# Altium PCB Load_Cell_Board.PcbDoc
Units mm, origin at the board's own origin, x right, y up, seen from the top; angles counter-clockwise.
Board outline 33.66 x 10.48 mm, 2 copper layers (Top Layer, Bottom Layer); 8 components, 8 nets, 28 pads, 0 vias.
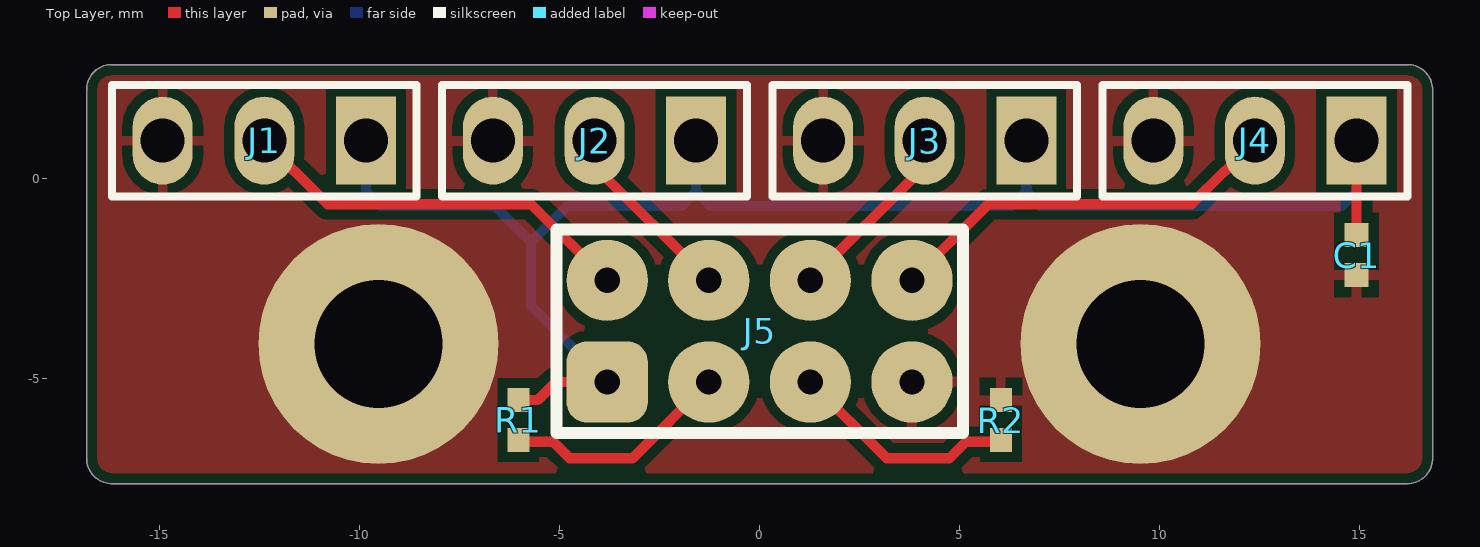
[diagram p0: Top Layer view]
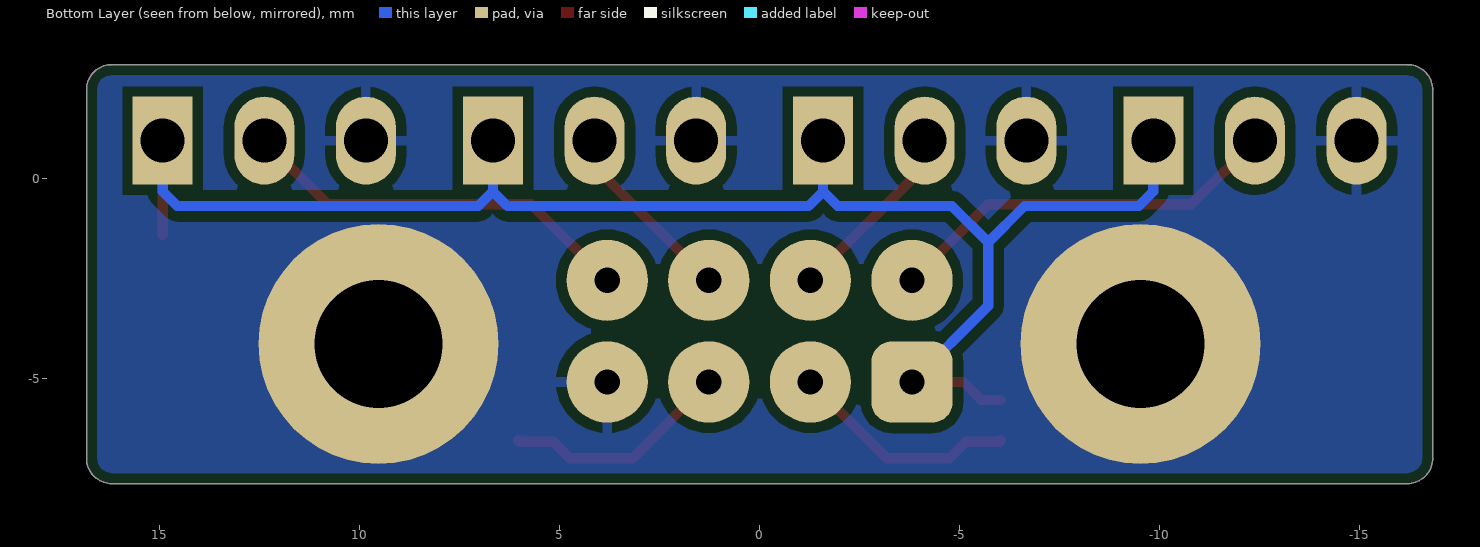
[diagram p1: Bottom Layer view, seen from below]
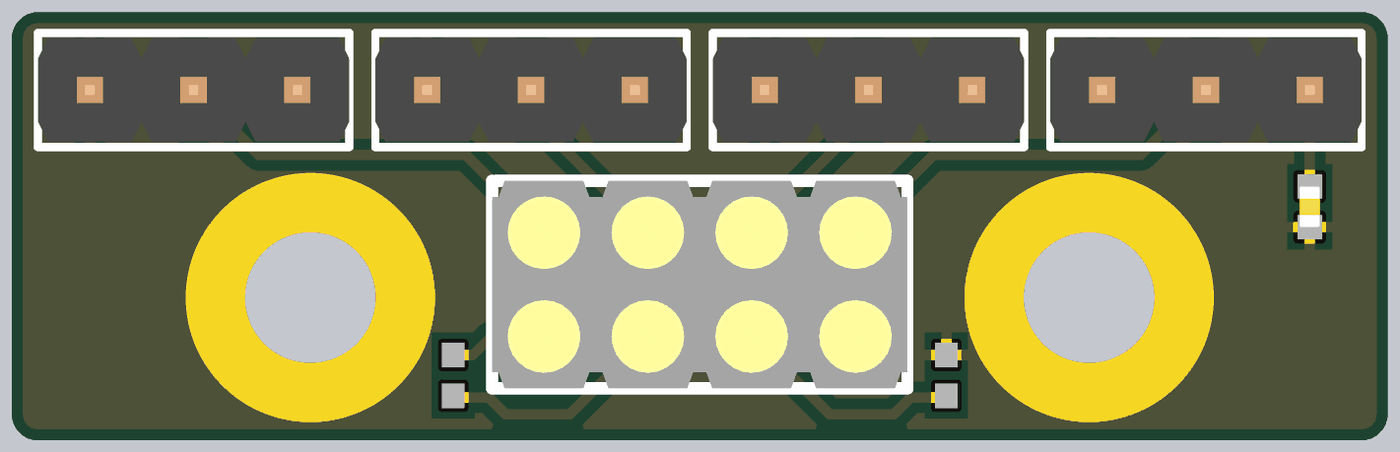
[diagram p2: 3D render of the assembled board from above, using the file's embedded part models]

## Layer stack, top to bottom
Top Solder: solder mask 0.0102, Solder Resist, Dk 3.5
Top Layer: signal copper 0.0356
Dielectric 1: dielectric 0.32, FR-4, Dk 4.8
Bottom Layer: signal copper 0.0356
Bottom Solder: solder mask 0.0102, Solder Resist, Dk 3.5

## Board outline
-16.192,-7.62 cw(c-16.192,-6.985) -16.828,-6.985 -16.828,2.222 cw(c-16.192,2.222) -16.192,2.857 16.192,2.857 cw(c16.192,2.222) 16.828,2.222 16.828,-6.985 cw(c16.192,-6.985) 16.192,-7.62

## Design rules (kind name [scope] priority, off if disabled: settings)
Clearance [All] p1: gap=0.254 ignorepadtopadclearanceinfootprint=FALSE except(0: Arc-Hole Track-Hole SMDPad-Hole THPad-Hole Via-Hole Fill-Hole Poly-Hole Region-Hole Text-Hole)
PolygonConnect [All] p1: connectstyle=Relief reliefconductorwidth=0.254 reliefentries=4 polygonreliefangle="90 Angle" airgapwidth=0.254
RoutingVias [All] p1: holewidth=0.711 width=1.27 viastyle="Through Hole" minholewidth=0.711 minwidth=1.27 maxholewidth=0.711 maxwidth=1.27
SolderMaskExpansion [All] p1: expansion=0.102 istentingtop=FALSE
Width [All] p1: maxlimit=0.254 minlimit=0.254 preferedwidth=0.254
30 further rules are at their usual default settings.

## Components (designator, comment, footprint, x,y, rotation, side; value= is the part's Value field where it differs from the comment)
C1 "10uF" Cap,SMD,0402 14.922,-1.905 r90 top
J1 "Term,Header,3 Pin,Top,2.54mm" Term,Header,3Pin,2.54mm -12.383,0.953 r180 top
J2 "Term,Header,3 Pin,Top,2.54mm" Term,Header,3Pin,2.54mm -4.127,0.953 r180 top
J3 "Term,Header,3 Pin,Top,2.54mm" Term,Header,3Pin,2.54mm 4.127,0.953 r180 top
J4 "Term,Header,3 Pin,Top,2.54mm" Term,Header,3Pin,2.54mm 12.383,0.953 r180 top
J5 "Conn,Spring,Target,8Pos,Thru" CONN,SPRING,TARGET,8POS,THRU -3.81,-5.08 r0 top
R1 "1k" RES,0402 -6.032,-6.032 r270 top
R2 "1k" RES,0402 6.032,-6.032 r270 top

## Footprints (in the part's own frame and the unit in brackets; to place one, negate y for a bottom-side part, rotate by r counter-clockwise, add the part's x,y. Pads: shape width x height; smd on the part's side, far side on the other; paste and mask are expansions set on the pad)
Cap,SMD,0402 [mm] "KEMET C0402C100K5GACTU"
  rect 0.6x0.6 smd: 1(-0.5,0) 2(0.5,0)
  body extent -0.5,-0.25 0.5,0.25, height 0.5
CONN,SPRING,TARGET,8POS,THRU [mil] "Mill Max Manufacturing Corp. 419-10-208-00-006000"
  rrect50% 80x80 hole 25 mask+1.97: 1(0,0)
  round 80 hole 25 mask+1.97: 2(100,0) 3(200,0) 4(300,0) 5(300,100) 6(200,100) 7(100,100) 8(0,100)
  silkscreen extent -50,-50 350,150, body extent -50,-50 350,150, height 166
RES,0402 [mm] "Yageo RC0402FR-0722RL"
  rect 0.6x0.55 smd: 1(-0.5,0) 2(0.5,0)
  body extent -0.5,-0.25 0.5,0.25, height 0.35
Term,Header,3Pin,2.54mm [mm] "Würth Elektronik 61300311121"
  rect 1.5x2.2 hole 1.1 mask+0.05: 1(-2.54,0)
  oval 1.5x2.2 hole 1.1 mask+0.05: 2(0,0) 3(2.54,0)
  silkscreen extent -3.81,-1.4 3.81,1.4, body extent -3.81,-1.27 3.81,1.27, height 8.57

## Part data
C1: library part CAP,Cer,10uF,10VDC,X5R,0402, "10 µF ±20% 10V Ceramic Capacitor X5R 0402 (1005 Metric)", Manufacturer="Samsung Electro-Mechanics", Manufacturer Part Number=CL05A106MP5NUNC, Vendor Part Number=1276-1450-1-ND, CreatedBy="Judd Foster", HelpURL=https://media.digikey.com/pdf/Data%20Sheets/Samsung%20PDFs/CL05A106MP5NUNC_Spec.pdf, Vendor=Digikey
J1 J2 J3 J4: "CONN HEADER VERT 3POS 2.54MM", Manufacturer="Würth Elektronik", Manufacturer Part Number=61300311121, Vendor Part Number=732-5316-ND, Created By="Judd Foster", HelpURL=https://katalog.we-online.de/em/datasheet/6130xx11121.pdf, Vendor=Digikey
J5: "8 Position Spring Mating Target Connector Through Hole", Manufacturer="Mill-Max Manufacturing Corp.", Manufacturer Part Number=419-10-208-00-006000, Vendor Part Number=ED1377-ND, CreatedBy="Judd Foster", HelpURL=https://www.mill-max.com/catalog/download/2017-11%3A021.pdf, Vendor=Digikey
R1 R2: library part RES,1k,5%,0.063W,0402, "1 kOhms ±5% 0.063W, 1/16W Chip Resistor 0402 (1005 Metric) Automotive AEC-Q200 Thick Film", Manufacturer="Stackpole Electronics Inc", Manufacturer Part Number=RMCF0402JT1K00, Vendor Part Number=RMCF0402JT1K00CT-ND, CreatedBy="Judd Foster", HelpURL=https://www.seielect.com/catalog/sei-rmcf_rmcp.pdf, Vendor=DIgikey

## Free pads (board coordinates)
  round 6 hole 3.2 unplated mask+0.05: 0(-9.525,-4.127) 0(9.525,-4.127)

## Nets (pads, with @x,y where several pads share a name; then routed paths per layer and width w, separated by ;. In a path a pad name is that pad's centre, name@x,y a point inside that pad or via, vN(x,y) a via of type N, cw(c..) or ccw(c..) an arc to the next point about the centre after c; other vN are vias at no path point)
A_GND: C1.1 J1.3 J2.3 J3.3 J4.3 J5.4 pad.0 R2.1
LOAD_CELL_1: J1.2 J5.8 | length 10
  Top Layer w0.254: J1.2 -12.383,0.94 -11.622,0.179 -11.609,0.179 -10.795,-0.635 -5.715,-0.635 J5.8
LOAD_CELL_2: J2.2 J5.7 | length 4.7
  Top Layer w0.254: J2.2 -4.127,0.318 J5.7
LOAD_CELL_3: J3.2 J5.6 | length 4.7
  Top Layer w0.254: J5.6 4.127,0.318 J3.2
LOAD_CELL_4: J4.2 J5.5 | length 10
  Top Layer w0.254: J5.5 5.715,-0.635 10.795,-0.635 11.609,0.179 11.622,0.179 12.383,0.94 J4.2
NetJ5_2: J5.2 R1.2 | length 5.7
  Top Layer w0.254: R1.2 -5.993,-6.572 -5.16,-6.572 -4.747,-6.985 -3.175,-6.985 J5.2
NetJ5_3: J5.3 R2.2 | length 5.7
  Top Layer w0.254: J5.3 3.175,-6.985 4.747,-6.985 5.16,-6.572 5.993,-6.572 R2.2
VDD_5VA: C1.2 J1.1 J2.1 J3.1 J4.1 J5.1 R1.1 | length 40.5
  Top Layer w0.254: R1.1 -5.55,-5.533 -5.098,-5.08 J5.1 ; C1.2 J4.1
  Bottom Layer w0.254: J1.1 -9.842,-0.318 -9.48,-0.68 -6.622,-0.68 -5.715,-1.587 ; J5.1 -5.715,-3.175 -5.715,-1.587 ; J2.1 -1.587,-0.318 ; J3.1 6.667,-0.318 ; J4.1 14.922,-0.318 14.56,-0.68 7.03,-0.68 6.667,-0.318 ; -5.715,-1.587 -4.808,-0.68 -1.95,-0.68 -1.587,-0.318 ; -1.587,-0.318 -1.225,-0.68 6.305,-0.68 6.667,-0.318

## Polygon pours and split planes (outlines as drawn)
A_GND on Top Layer "NONET_L02_P-001" (solid, pour order 0): 16.828,-7.62 16.828,2.857 -16.828,2.857 -16.828,-7.62
A_GND on Bottom Layer "NONET_L02_P-001" (solid, pour order 1): 16.828,-7.62 16.828,2.857 -16.828,2.857 -16.828,-7.62

## Keep-outs
Keep-Out Layer:
  the board outline again, w0.01